# Altium PCB M-Test-Board.PcbDoc (part 2 of 2)
Units mm, origin at the board's own origin, x right, y up, seen from the top; angles counter-clockwise.
Board outline 140.08 x 105.54 mm, 2 copper layers (Top Layer, Bottom Layer); 209 components, 139 nets, 677 pads, 0 vias.
Unrouted connection lines stored in the file: 434.
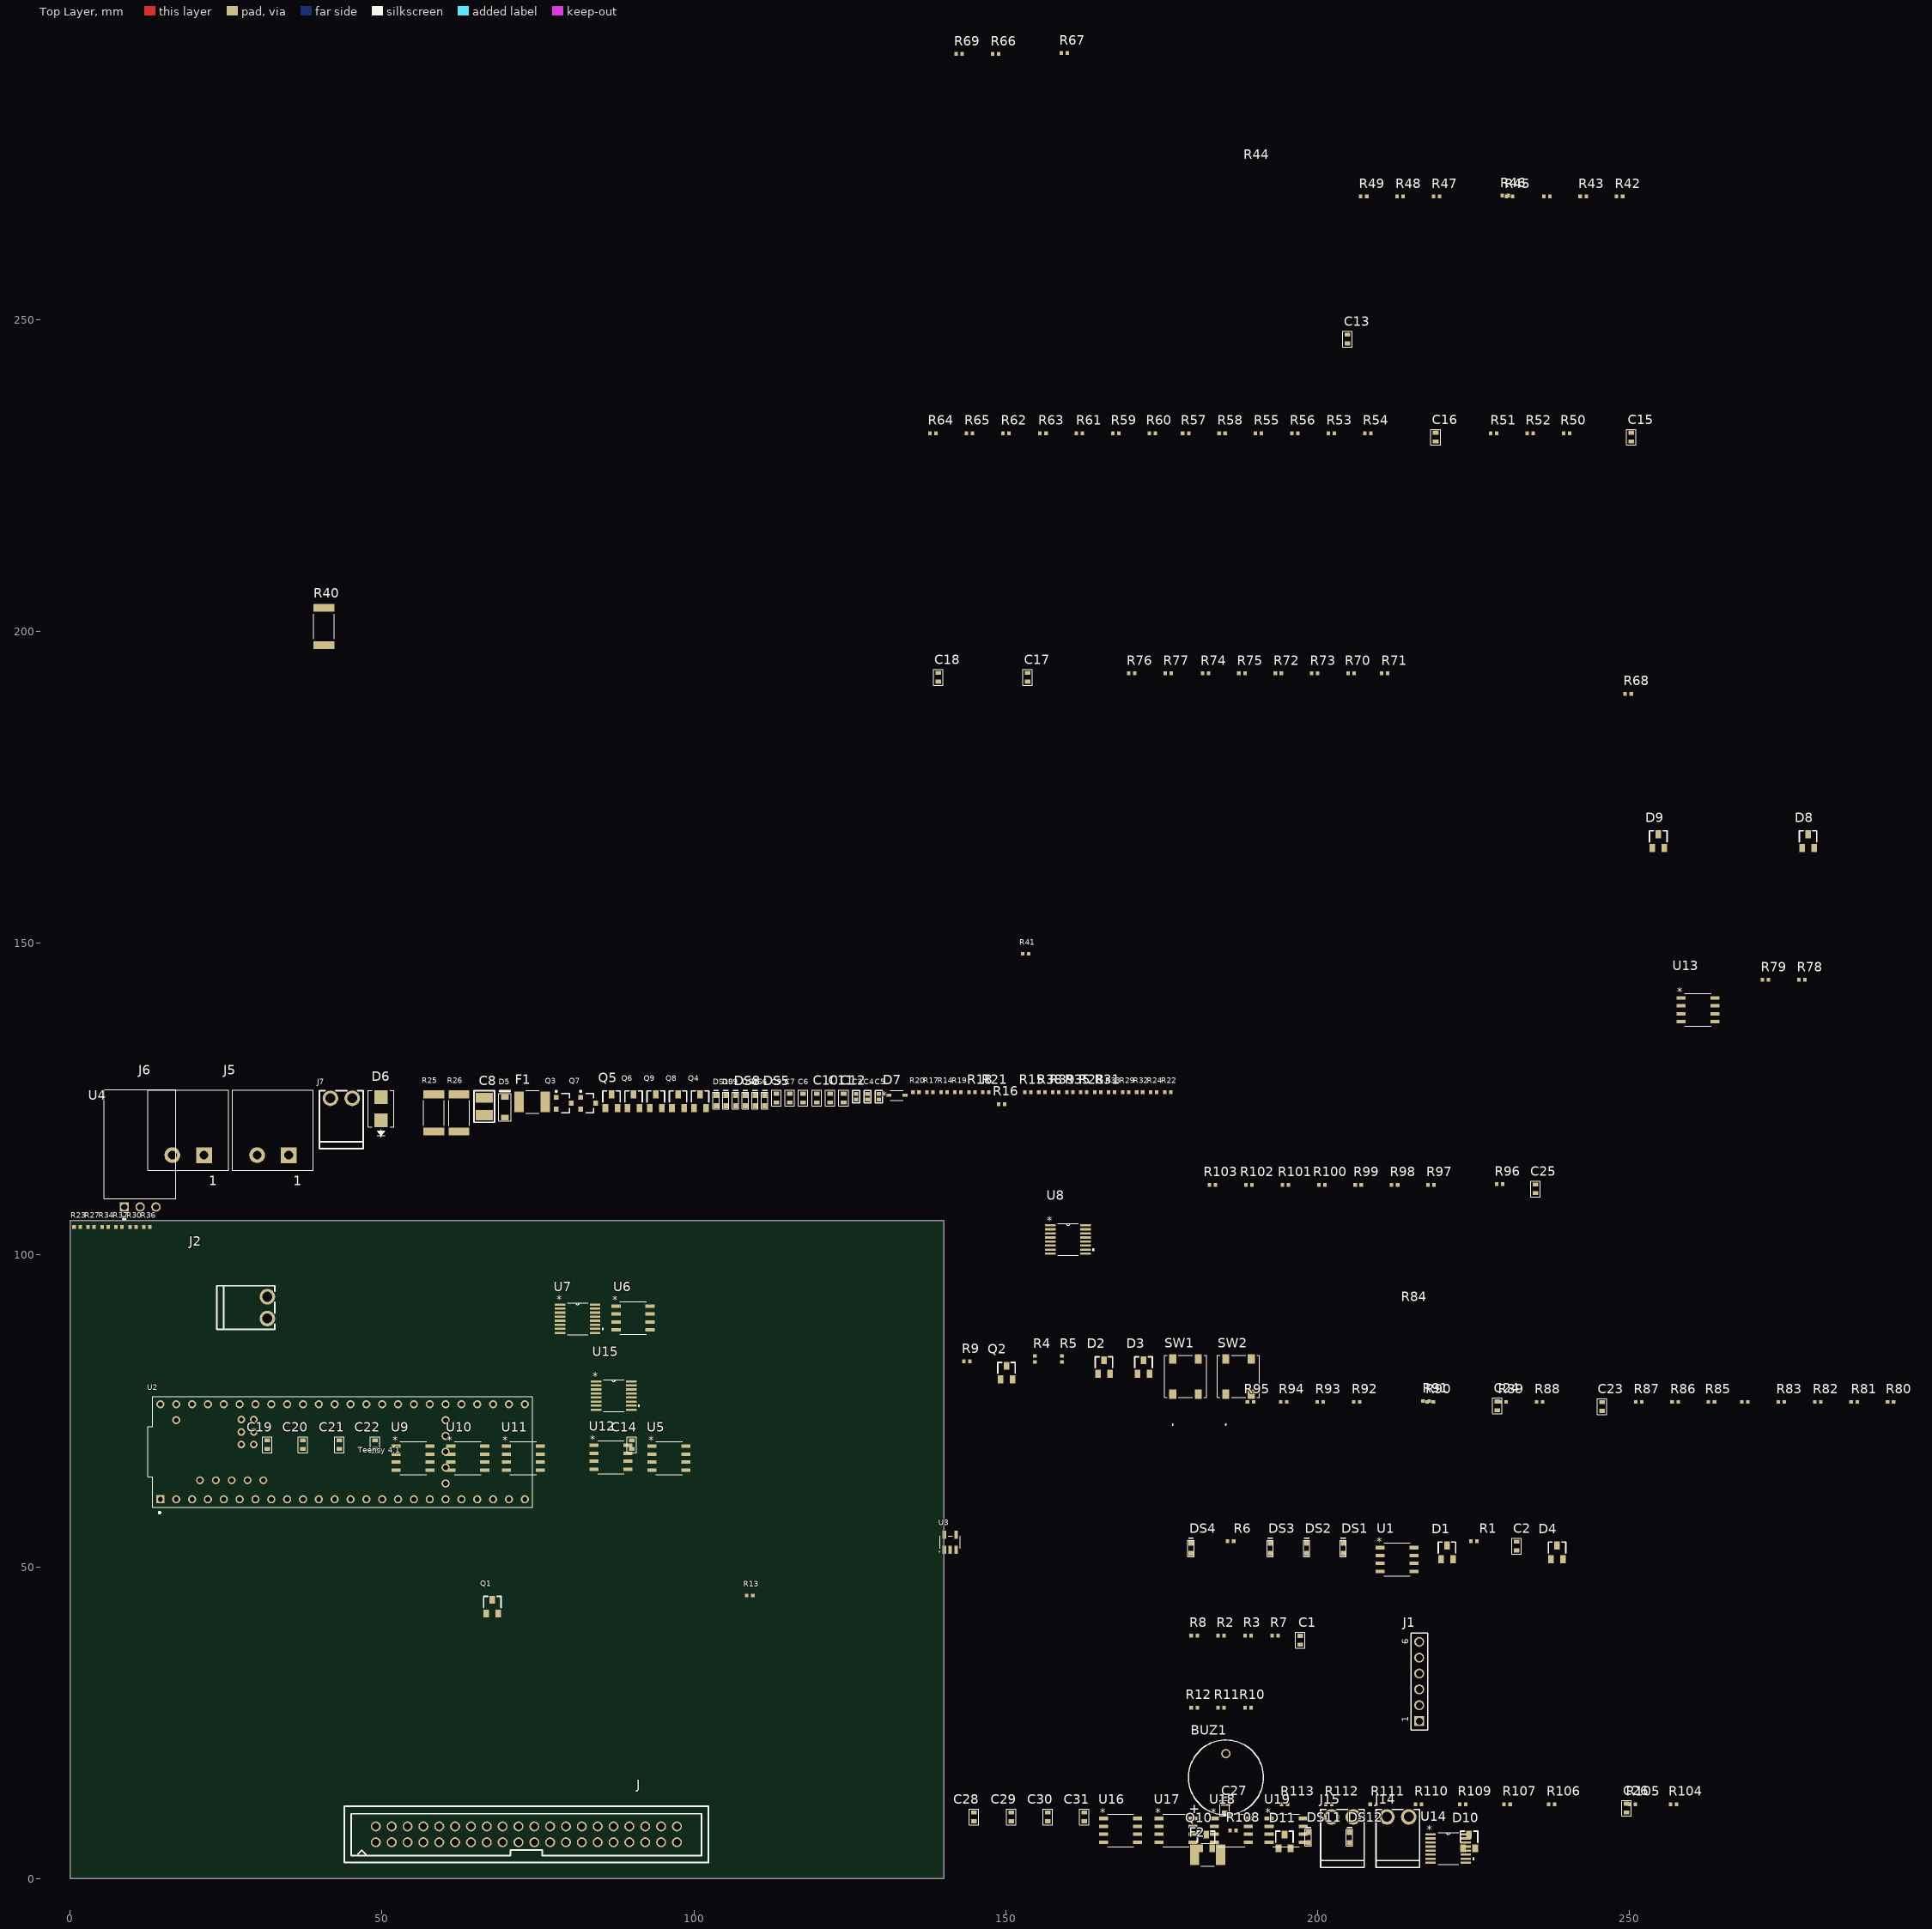
[diagram p0: Top Layer view]

## Part data (continued)
Q1 Q2 Q4 Q6 Q8 Q9 Q10: library part Tran-0002, "Trans GP BJT NPN 60V 0.2A 350mW Automotive 3-Pin SOT-23 T/R", Case/Package=SOT-23-3, Collector-emitter Voltage-Max=400mV, Frequency=250MHz, LCSC Part Number=C20526, Manufacturer="ON Semiconductor / Fairchild", Max Collector Current=200mA, Max Operating Temperature=150°C, Min Operating Temperature=-55°C, Package Description="3-Pin Small Outline Transistor, Body 2.9 x 1.3 mm, Pitch 0.95 mm", Package Reference="SOT-23 (318-08)", Power=225mW, Supplier Part Number 1=58K9431, Component Type=Transistors, ComponentLink1Description=https://datasheet.ciiva.com/22664/1708270-226, ComponentLink1URL=https://datasheet.ciiva.com/22664/1708270-226, ComponentLink2Description=https://datasheet.ciiva.com/4721/mmbt3906lt1-, ComponentLink2URL=https://datasheet.ciiva.com/4721/mmbt3906lt1-, ComponentLink3Description=https://datasheet.ciiva.com/11201/mmbt3906lt1, ComponentLink3URL=https://datasheet.ciiva.com/11201/mmbt3906lt1, ComponentLink4Description=https://datasheet.ciiva.com/16387/mmbt3906lt1, ComponentLink4URL=https://datasheet.ciiva.com/16387/mmbt3906lt1, ComponentLink5Description=https://datasheet.ciiva.com/976/mmbt3906lt1-d, ComponentLink5URL=https://datasheet.ciiva.com/976/mmbt3906lt1-d, ComponentLink6Description=https://datasheet.ciiva.com/976/mmbt3906lt1-d, ComponentLink6URL=https://datasheet.ciiva.com/976/mmbt3906lt1-d, ComponentLink7Description=https://datasheet.ciiva.com/976/mmbt3906lt1-d, ComponentLink7URL=https://datasheet.ciiva.com/976/mmbt3906lt1-d, Datasheet URL=http://www.onsemi.cn/pub_link/Collateral/MMBT3904LT1-D.PDF, Datasheet Version="Rev. 12, 11/2012", Elements=1, Height=0.94mm, Lead Free="Lead Free", Length=2.9mm, Manufacturer Part Number=MMBT3904, Max Frequency=250MHz, Mount="Surface Mount", Mounting Technology=SM, Number of Elements=1, Part Name=Tran-0002, Pins=3, Polarity=NPN, Radiation Hardening=No, REACH SVHC="No SVHC", RoHS=Yes, RoHS Compliant=Yes, Series=-, Supplier 1=Newark, Vce Max=300mV, Width=1.3mm
Q3 Q7: library part Tran-0001, "Mosfet P-channel 30V 4A SOT23-3", Case/Package=SOT-23-3, Collector Base Voltage (VCBO)=60V, Collector Emitter Breakdown Voltage=40V, Collector Emitter Saturation Voltage=300mV, Continuous Drain Current=4A, Current Rating=200mA, Drain to Source Voltage (Vdss)=30V, Emitter Base Voltage (VEBO)=6V, Frequency=300MHz, Frequency (Max)=NotRequiredMHz, Gate-Source Voltage (Max)=?12V, Input Capacitance=645pF, LCSC Part Number=C15127, Manufacturer="Alpha & Omega Semiconductor", Manufacturer Part Number=AO3401AL, Max Operating Temperature=150°C, Max Power Dissipation=1.4W, Min Operating Temperature=-55°C, Operating Temp Range=-55Cto150C, Operating Temperature Classification=Military, Output Power (Max)=NotRequiredW, Package Description="3-Pin Small Outline Transistor, Body 2.95 x 1.6 mm, Pitch 0.95 mm", Package Quantity=1, Package Reference=SOT-23-3L, Package Type=SOT-23, Power Dissipation=350mW, Power Gain=NotRequireddB, Supplier Part Number 1=AO3401AL-ND, Category=BJTs, Channel Mode=Enhancement, Collector Emitter Voltage (VCEO)=40V, ComponentLink1Description=https://media.digikey.com/pdf/Data%20Sheets/A, ComponentLink1URL=https://media.digikey.com/pdf/Data%20Sheets/A, ComponentLink2Description=https://datasheet.ciiva.com/7972/2n3904-79726, ComponentLink2URL=https://datasheet.ciiva.com/7972/2n3904-79726, ComponentLink3Description=https://datasheet.ciiva.com/22653/1922793-226, ComponentLink3URL=https://datasheet.ciiva.com/22653/1922793-226, ComponentLink4Description=https://datasheet.ciiva.com/11201/mmbt3904-11, ComponentLink4URL=https://datasheet.ciiva.com/11201/mmbt3904-11, ComponentLink5Description=https://datasheet.ciiva.com/16850/mmbt3904-16, ComponentLink5URL=https://datasheet.ciiva.com/16850/mmbt3904-16, ComponentLink6Description=https://datasheet.ciiva.com/971/mmbt3904-9718, ComponentLink6URL=https://datasheet.ciiva.com/971/mmbt3904-9718, ComponentLink7Description=https://datasheet.ciiva.com/971/mmbt3904-9718, ComponentLink7URL=https://datasheet.ciiva.com/971/mmbt3904-9718, ComponentLink8Description=https://datasheet.ciiva.com/971/mmbt3904-9718, ComponentLink8URL=https://datasheet.ciiva.com/971/mmbt3904-9718, Contact Plating=Tin,Matte, Continuous Drain Current (ID)=4A, Datasheet URL=http://www.aosmd.com/res/data_sheets/AO3401A.pdf, Datasheet Version="Rev. 3, 03/2011", Drain Current (Max)=4A, Drain Efficiency=NotRequired%, Drain-Source On-Res=0.044ohm, Drain-Source On-Volt=30V, Element Configuration=Single, Gain Bandwidth Product=300MHz, Height=0.25inch, hFE Min=100, Lead Free="Lead Free", Length=0.25inch, Manufacturer URL=http://www.aosmd.com/, Max Breakdown Voltage=40V, Max Collector Current=200mA, Max Frequency=300MHz, Mount="Surface Mount", Mounting=SurfaceMount, Mounting Technology=SurfaceMount, Noise Figure=NotRequireddB, Number of  Elements=1, Number of Elements=1, Number of Pins=3, Package URL=http://www.aosmd.com/res/packaging_information/SOT-23-3L.pdf, Packaging="Tape and Reel", Part Name=Tran-0001, Pin Count=3, Polarity=NPN, Pricing 1="1=0.03200, 10=0.02500, 100=0.01700, 500=0.017", Rad Hardened=No, Radiation Hardening=No, Rds On Max=50mR, REACH SVHC="No SVHC", RoHS=Yes, RoHS Compliant=Yes, Supplier 1=Digi-Key, Termination=SMD/SMT, Transition Frequency=300MHz, Type=PowerMOSFET, Voltage Rating (DC)=40V, Weight=0.03g, Width=0.25inch
Q5: library part Tran-0003, "PNP Ic=-200mA Vceo=-40V hfe=100~300 P=225mW SOT-23", Case/Package=SOT-23-3, Collector Base Voltage (VCBO)=40V, Collector Emitter Saturation Voltage=-400mV, Current Rating=-200mA, Emitter Base Voltage (VEBO)=5V, LCSC Part Number=C2143, Manufacturer="ON Semiconductor", Manufacturer Part Number=MMBT3906LT1G, Max Collector Current=200mA, Max Operating Temperature=150°C, Max Power Dissipation=300mW, Min Operating Temperature=-55°C, Package Description="3-Pin Small Outline Transistor, Body 2.9 x 1.3 mm, Pitch 0.95 mm", Package Quantity=1, Package Reference="SOT-23 (318-08)", Power=225mW, Supplier Part Number 1=863-MMBT3906LT1G, Transition Frequency=250MHz, Voltage Rating (DC)=-40V, Category=BJTs, Collector Emitter Breakdown Voltage=40V, Collector Emitter Voltage (VCEO)=40V, Component Type=Transistors, Contact Plating=Tin,Matte, Datasheet URL=http://www.onsemi.cn/pub_link/Collateral/MMBT3906LT1-D.PDF, Datasheet Version="Rev. 12, 10/2016", Element Configuration=Single, Elements=1, Gain Bandwidth Product=250MHz, hFE Min=60, Max Breakdown Voltage=40V, Mount="Surface Mount", Mounting Technology=SM, Number of Pins=3, Packaging="Tape and Reel", Part Name=Tran-0003, Pins=3, Polarity=PNP, Power Dissipation=300mW, Pricing 1="1=0.15000, 10=0.14600, 50=0.14600, 100=0.0790", RoHS=Yes, Supplier 1=Mouser, Vce Max=400mV
R1 R17 R29 R41: library part Res-00004, "Thick Film 0402 5.1K Ohm 1% 1/16W 0402", Case Code (Imperial)=0402, Case Code (Metric)=1005, LCSC Part Number=C25905, Manufacturer="Stackpole Electronics", Manufacturer Part Number=RMCF0402FT5K10, Max Operating Temperature=155°C, Max Power Dissipation=63mW, Min Operating Temperature=-55°C, Power Rating=62.5mW, Resistance=5.1k, Resistor Type="Thick Film", Supplier Part Number 1=RMCF0402FT5K10CT-ND, Temperature Coefficient=100ppm/°C, Tolerance=1%, Case/Package=0402, Category="Chip SMD Resistors", ComponentLink1Description=http://components.arrow.com/part/dataview/513, ComponentLink1URL=http://components.arrow.com/part/dataview/513, ComponentLink2Description=https://www.seielect.com/catalog/SEI-RMCF_RMC, ComponentLink2URL=https://www.seielect.com/catalog/SEI-RMCF_RMC, ComponentLink3Description=https://www.seielect.com/catalog/SEI-Packagin, ComponentLink3URL=https://www.seielect.com/catalog/SEI-Packagin, ComponentLink4Description=https://datasheet.ciiva.com/15193/getdatashee, ComponentLink4URL=https://datasheet.ciiva.com/15193/getdatashee, Construction=Rectangular, Contact Plating=Tin,Matte, Depth=0.5mm, Features="Automotive AEC-Q200", Height=0.016inch, Lead Free="Lead Free", Length=0.039inch, Military Standard=Not, Mount="Surface Mount", Number of Terminations=2, Packaging="Tape and Reel", Part Name=Res-00004, Pricing 1="1=0.10000, 10=0.01500, 100=0.00610, 1000=0.00", Radiation Hardening=No, RoHS=Yes, RoHS Compliant=Yes, Series=RMCF, Size Code=0402, Stock 1=131490, Supplier 1=Digi-Key, Width=0.02inch
R2 R3 R10 R11 R12 R13 R14 R39: library part Res-00009, "Thick Film 0402 330 Ohm 1% 1/16W ±100ppm/°C Molded SMD Paper T/R", Case Code (Imperial)=0402, Case Code (Metric)=1005, LCSC Part Number=C51721, Manufacturer=Yageo, Manufacturer Part Number=AF0402FR-07330RL, Max Operating Temperature=155°C, Max Power Dissipation=63mW, Min Operating Temperature=-55°C, Power Rating=62.5mW, Resistance=330R, Resistor Type="Thick Film", Supplier Part Number 1=13-AF0402FR-07330RLCT-ND, Temperature Coefficient=100ppm/°C, Tolerance=1%, Case/Package=0402, Category="Chip SMD Resistors", ComponentLink1Description=http://www.yageo.com/documents/recent/PYu-AF_, ComponentLink1URL=http://www.yageo.com/documents/recent/PYu-AF_, Features="Moisture Resistant,Anti-Sulfur", Height=0.015inch, Length=0.039inch, Mount="Surface Mount", Number of Terminations=2, Packaging="Tape and Reel", Part Name=Res-00009, Pricing 1="1=0.10000, 10=0.05800, 100=0.02360, 1000=0.01", Radiation Hardening=No, RoHS=Yes, RoHS Compliant=Yes, Stock 1=15948, Supplier 1=Digi-Key, Width=0.02inch
R4 R5 R9: library part Res-00001, "Thick Film 0402 1K Ohm 1% 1/8W 0402", Case Code (Imperial)=0402, Case Code (Metric)=1005, LCSC Part Number=C25792, Manufacturer="TE Connectivity", Manufacturer Part Number=CRGP0402F1K0, Max Operating Temperature=155°C, Max Power Dissipation=125mW, Min Operating Temperature=-55°C, Power Rating=0.125W, Resistance=1k, Resistor Type="Thick Film", Supplier Part Number 1=A130355CT-ND, Temperature Coefficient=100ppm/°C, Tolerance=1%, Case/Package=0402, Category="Chip SMD Resistors", ComponentLink1Description=https://www.te.com/commerce/DocumentDelivery/, ComponentLink1URL=https://www.te.com/commerce/DocumentDelivery/, ComponentLink4Description=none, Mount="Surface Mount", Number of Terminations=2, Packaging="Tape and Reel", Part Name=Res-00001, Pricing 1="1=0.12000, 10=0.11100, 100=0.04270, 1000=0.01", RoHS=Yes, RoHS Compliant=Yes, Stock 1=16450, Supplier 1=Digi-Key
R6: library part Res-00013, "Res Thick Film 0402 120 Ohm 1% 0.063W(1/16W) ±100ppm/C Pad SMD Automotive T/R", Case Code (Imperial)=0402, Case Code (Metric)=1005, LCSC Part Number=C25079, Manufacturer="Stackpole Electronics", Manufacturer Part Number=RMCF0402FT120R, Max Operating Temperature=155°C, Max Power Dissipation=63mW, Min Operating Temperature=-55°C, Package Quantity=10000, Resistor Type="Thick Film", Supplier Part Number 1=RMCF0402FT120RCT-ND, Temperature Coefficient=100ppm/°C, Tolerance=1%, Case/Package=0402, Category="Chip SMD Resistors", ComponentLink1Description=http://components.arrow.com/part/dataview/514, ComponentLink1URL=http://components.arrow.com/part/dataview/514, ComponentLink2Description=https://www.seielect.com/catalog/SEI-RMCF_RMC, ComponentLink2URL=https://www.seielect.com/catalog/SEI-RMCF_RMC, ComponentLink3Description=http://www.seielect.com/Catalog/SEI-RMCF_RMCP, ComponentLink3URL=http://www.seielect.com/Catalog/SEI-RMCF_RMCP, ComponentLink4Description=https://www.seielect.com/Catalog/SEI-RMCF_RMC, ComponentLink4URL=https://www.seielect.com/Catalog/SEI-RMCF_RMC, ComponentLink5Description=https://www.seielect.com/catalog/SEI-Packagin, ComponentLink5URL=https://www.seielect.com/catalog/SEI-Packagin, Contact Plating=Tin,Matte, Features="Automotive AEC-Q200", Height=0.016inch, Length=0.039inch, Mount="Surface Mount", Number of Terminations=2, Packaging="Tape and Reel", Part Name=Res-00013, Power Rating=63mW, Pricing 1="1=0.10000, 10=0.01500, 100=0.00610, 1000=0.00", Radiation Hardening=No, Resistance=120R, RoHS=Yes, RoHS Compliant=Yes, Series=RMCF, Stock 1=195943, Supplier 1=Digi-Key, Width=0.02inch
R7 R15 R16 R18 R19 R22 R23 R27 R28 R30 R31 R36 R50 R51 R52 R53 R54 R55 R56 R57 R58 R59 R60 R61 R62 R63 R64 R65 R66 R67 R68 R69 R70 R71 R72 R73 R74 R75 R76 R77 R88 R89 R90 R91 R92 R93 R94 R95 R100 R101 R102 R104 R105 R106 R107 R109 R110 R111 R112 R113: library part Res-00002, "Thick Film 0402 10K OHM 1% 1/16W 0402", Case Code (Imperial)=0402, Case Code (Metric)=1005, LCSC Part Number=C25744, Manufacturer=Yageo, Manufacturer Part Number=RC0402FR-0710KP, Max Operating Temperature=155°C, Max Power Dissipation=63mW, Min Operating Temperature=-55°C, Power Rating=62.5mW, Resistance=10k, Resistor Type="Thick Film", Supplier Part Number 1=YAG1249CT-ND, Temperature Coefficient=150ppm/°C, Tolerance=1%, Case/Package=0402, Category="Chip SMD Resistors", ComponentLink1Description=http://www.yageo.com/NewPortal/yageodocoutput, ComponentLink1URL=http://www.yageo.com/NewPortal/yageodocoutput, Features="Moisture Resistant", Height=0.016inch, Length=0.039inch, Mount="Surface Mount", Number of Terminations=2, Packaging="Tape and Reel", Part Name=Res-00002, Pricing 1="1=0.10000, 10=0.03600, 100=0.01450, 1000=0.00", RoHS=Yes, RoHS Compliant=Yes, Stock 1=161500, Supplier 1=Digi-Key, Width=0.02inch
R8 R20 R24 R32 R33 R37: library part Res-00003, "Thick Film 0402 100K OHM 1% 1/16W 0402", Case Code (Imperial)=0402, Case Code (Metric)=1005, LCSC Part Number=C25741, Manufacturer="Stackpole Electronics", Manufacturer Part Number=RMCF0402FT100K, Power Rating=62.5mW, Supplier Part Number 1=RMCF0402FT100KCT-ND, Case/Package=0402, Category="Chip SMD Resistors", Contact Plating=Tin,Matte, Mount="Surface Mount", Part Name=Res-00003, Pricing 1="1=0.10000, 10=0.01500, 100=0.00610, 1000=0.00", RoHS=Yes, Stock 1=13703190, Supplier 1=Digi-Key
R21 R34 R35 R45 R49 R86 R87 R103: library part Res-00008, "Thick Film 0402 2.8K Ohm 1% 0.063W ±100ppm/°C Molded SMD Paper T/R", Case Code (Imperial)=0402, Case Code (Metric)=1005, LCSC Part Number=C62741, Manufacturer="Stackpole Electronics", Manufacturer Part Number=RMCF0402FT2K80, Max Operating Temperature=155°C, Max Power Dissipation=63mW, Min Operating Temperature=-55°C, Power Rating=62.5mW, Resistance=2.8kR, Resistor Type="Thick Film", Supplier Part Number 1=RMCF0402FT2K80CT-ND, Temperature Coefficient=100ppm/°C, Tolerance=1%, Case/Package=0402, Category="Chip SMD Resistors", ComponentLink1Description=https://www.seielect.com/catalog/SEI-RMCF_RMC, ComponentLink1URL=https://www.seielect.com/catalog/SEI-RMCF_RMC, ComponentLink2Description=https://www.seielect.com/Catalog/SEI-RMCF_RMC, ComponentLink2URL=https://www.seielect.com/Catalog/SEI-RMCF_RMC, ComponentLink3Description=https://www.seielect.com/catalog/SEI-Packagin, ComponentLink3URL=https://www.seielect.com/catalog/SEI-Packagin, Contact Plating=Tin,Matte, Features="Automotive AEC-Q200", Height=0.016inch, Lead Free="Lead Free", Length=0.039inch, Mount="Surface Mount", Number of Terminations=2, Packaging="Tape and Reel", Part Name=Res-00008, Pricing 1="1=0.10000, 10=0.01500, 100=0.00610, 1000=0.00", Radiation Hardening=No, RoHS=Yes, RoHS Compliant=Yes, Series=RMCF, Stock 1=141882, Supplier 1=Digi-Key, Width=0.02inch
R25 R26 R40: library part Res-00005, "Thick Film  220 OHM 5% 1W 2512", Case Code (Imperial)=2512, Case Code (Metric)=6432, LCSC Part Number=C38808, Manufacturer="Stackpole Electronics", Manufacturer Part Number=RMCF2512JT220R, Max Operating Temperature=155°C, Max Power Dissipation=1W, Min Operating Temperature=-55°C, Resistance=220R, Resistor Type="Thick Film", Supplier Part Number 1=RMCF2512JT220RCT-ND, Temperature Coefficient=200ppm/°C, Tolerance=5%, Case/Package=2512, Category="Chip SMD Resistors", ComponentLink1Description=https://datasheet.ciiva.com/15193/getdatashee, ComponentLink1URL=https://datasheet.ciiva.com/15193/getdatashee, Construction=Rectangular, Contact Plating=Tin,Matte, Depth=3.2mm, Features="Automotive AEC-Q200", Height=0.028inch, Lead Free="Lead Free", Length=0.248inch, Military Standard=Not, Mount="Surface Mount", Number of Terminations=2, Packaging="Tape and Reel", Part Name=Res-00005, Power Rating=1W, Pricing 1="1=0.30000, 10=0.25300, 100=0.09890, 1000=0.04", Radiation Hardening=No, RoHS=Yes, RoHS Compliant=Yes, Series=RMCF, Size Code=2512, Stock 1=85, Supplier 1=Digi-Key, Width=0.126inch
R38: library part Res-00010, "Thick Film 0402 680 Ohm 1% 0.063W(1/16W) ±100ppm/C Pad SMD Automotive T/R", Case Code (Imperial)=0402, Case Code (Metric)=1005, LCSC Part Number=C25130, Manufacturer="Stackpole Electronics", Manufacturer Part Number=RMCF0402FT680R, Max Operating Temperature=155°C, Max Power Dissipation=63mW, Min Operating Temperature=-55°C, Package Quantity=10000, Power Rating=62.5mW, Resistance=680R, Resistor Type="Thick Film", Supplier Part Number 1=RMCF0402FT680RCT-ND, Temperature Coefficient=100ppm/°C, Tolerance=1%, Case/Package=0402, Category="Chip SMD Resistors", ComponentLink1Description=http://www.seielect.com/Catalog/SEI-RMCF_RMCP, ComponentLink1URL=http://www.seielect.com/Catalog/SEI-RMCF_RMCP, ComponentLink2Description=https://www.seielect.com/catalog/SEI-RMCF_RMC, ComponentLink2URL=https://www.seielect.com/catalog/SEI-RMCF_RMC, ComponentLink3Description=https://www.seielect.com/Catalog/SEI-RMCF_RMC, ComponentLink3URL=https://www.seielect.com/Catalog/SEI-RMCF_RMC, ComponentLink4Description=https://www.seielect.com/catalog/SEI-Packagin, ComponentLink4URL=https://www.seielect.com/catalog/SEI-Packagin, Contact Plating=Tin,Matte, Features="Automotive AEC-Q200", Height=0.016inch, Length=0.039inch, Mount="Surface Mount", Number of Terminations=2, Packaging="Tape and Reel", Part Name=Res-00010, Pricing 1="1=0.10000, 10=0.01500, 100=0.00610, 1000=0.00", Radiation Hardening=No, RoHS=Yes, RoHS Compliant=Yes, Series=RMCF, Stock 1=143190, Supplier 1=Digi-Key, Width=0.02inch
R42 R43 R44 R78 R79 R80 R81 R82 R83 R84 R85 R96 R97 R98 R99: library part Res-00011, "Res Thick Film 0402 51K Ohm 1% 0.063W(1/16W) ±100ppm/C Pad SMD Automotive T/R", Case Code (Imperial)=0402, Case Code (Metric)=1005, LCSC Part Number=C25794, Manufacturer="Stackpole Electronics", Manufacturer Part Number=RMCF0402FT51K0, Max Operating Temperature=155°C, Max Power Dissipation=63mW, Min Operating Temperature=-55°C, Resistance=51kR, Resistor Type="Thick Film", Supplier Part Number 1=RMCF0402FT51K0CT-ND, Temperature Coefficient=100ppm/°C, Tolerance=1%, Case/Package=0402, Category="Chip SMD Resistors", ComponentLink1Description=http://components.arrow.com/part/dataview/535, ComponentLink1URL=http://components.arrow.com/part/dataview/535, ComponentLink2Description=https://www.seielect.com/catalog/SEI-RMCF_RMC, ComponentLink2URL=https://www.seielect.com/catalog/SEI-RMCF_RMC, ComponentLink3Description=https://www.seielect.com/Catalog/SEI-RMCF_RMC, ComponentLink3URL=https://www.seielect.com/Catalog/SEI-RMCF_RMC, ComponentLink4Description=https://www.seielect.com/catalog/SEI-Packagin, ComponentLink4URL=https://www.seielect.com/catalog/SEI-Packagin, Contact Plating=Tin,Matte, Features="Automotive AEC-Q200", Height=0.016inch, Length=0.039inch, Mount="Surface Mount", Number of Terminations=2, Packaging="Tape and Reel", Part Name=Res-00011, Power Rating=63mW, Pricing 1="1=0.10000, 10=0.01500, 100=0.00610, 1000=0.00", Radiation Hardening=No, RoHS=Yes, RoHS Compliant=Yes, Series=RMCF, Stock 1=588931, Supplier 1=Digi-Key, Width=0.02inch
R46 R47 R48: library part Res-00012, "Res Thick Film 0402 8.2K Ohm 5% 0.063W ±100ppm/°C Molded SMD Paper T/R", Case Code (Imperial)=0402, Case Code (Metric)=1005, LCSC Part Number=C25924, Manufacturer="Stackpole Electronics", Manufacturer Part Number=RMCF0402JT8K20, Max Operating Temperature=155°C, Max Power Dissipation=63mW, Min Operating Temperature=-55°C, Resistance=8.2kR, Resistor Type="Thick Film", Supplier Part Number 1=738-RMCF0402JT8K20CT-ND, Temperature Coefficient=100ppm/°C, Tolerance=5%, Case/Package=0402, Category="Chip SMD Resistors", ComponentLink1Description=https://www.seielect.com/Catalog/SEI-RMCF_RMC, ComponentLink1URL=https://www.seielect.com/Catalog/SEI-RMCF_RMC, ComponentLink2Description=https://www.seielect.com/catalog/sei-rmcf_rmc, ComponentLink2URL=https://www.seielect.com/catalog/sei-rmcf_rmc, ComponentLink3Description=https://www.seielect.com/catalog/SEI-RMCF_RMC, ComponentLink3URL=https://www.seielect.com/catalog/SEI-RMCF_RMC, ComponentLink4Description=http://www.seielect.com/Catalog/Sei-RMC.pdf?s, ComponentLink4URL=http://www.seielect.com/Catalog/Sei-RMC.pdf?s, Contact Plating=Tin,Matte, Features="Automotive AEC-Q200", Height=0.016inch, Lead Free="Lead Free", Length=0.039inch, Mount="Surface Mount", Number of Terminations=2, Packaging="Tape and Reel", Part Name=Res-00012, Power Rating=63mW, Pricing 1="1=0.10000, 10=0.01200, 100=0.00470, 1000=0.00", Radiation Hardening=No, RoHS=Yes, RoHS Compliant=Yes, Series=RMCF, Size Code=0402, Stock 1=9938, Supplier 1=Digi-Key, Width=0.02inch
R108: library part Res-00009, "Thick Film 0402 120 Ohm 1% 1/16W ±100ppm/°C Molded SMD Paper T/R", Case Code (Imperial)=0402, Case Code (Metric)=1005, LCSC Part Number=C51721, Manufacturer=Yageo, Manufacturer Part Number=AF0402FR-07330RL, Max Operating Temperature=155°C, Max Power Dissipation=63mW, Min Operating Temperature=-55°C, Power Rating=62.5mW, Resistance=330R, Resistor Type="Thick Film", Supplier Part Number 1=13-AF0402FR-07330RLCT-ND, Temperature Coefficient=100ppm/°C, Tolerance=1%, Case/Package=0402, Category="Chip SMD Resistors", ComponentLink1Description=http://www.yageo.com/documents/recent/PYu-AF_, ComponentLink1URL=http://www.yageo.com/documents/recent/PYu-AF_, Features="Moisture Resistant,Anti-Sulfur", Height=0.015inch, Length=0.039inch, Mount="Surface Mount", Number of Terminations=2, Packaging="Tape and Reel", Part Name=Res-00009, Pricing 1="1=0.10000, 10=0.05800, 100=0.02360, 1000=0.01", Radiation Hardening=No, RoHS=Yes, RoHS Compliant=Yes, Stock 1=15948, Supplier 1=Digi-Key, Width=0.02inch
SW1: library part SW-0001, "Switch Tactile N.O. SPST Round Button J-Bend", Actuator Color=Blue, Case/Package=SMD/SMT, Current Rating=50mA, LCSC Part Number=C221766, Manufacturer="ITT C&K", Manufacturer Part Number=KSC741JLFS, Max Operating Temperature=85°C, Max Voltage Rating (DC)=32V, Min Operating Temperature=-40°C, Operating Force=4N, Package Quantity=1000, Power Rating=1W, Ratings="IP67,Waterproof,Dust Tight", Supplier Part Number 1=CKN10309CT-ND, Actuator Length=1.7mm, Actuator Type=Standard, Category="Tactile Switches", ComponentLink1Description=https://datasheet.ciiva.com/16458/ksc741jlfs-, ComponentLink1URL=https://datasheet.ciiva.com/16458/ksc741jlfs-, ComponentLink2Description=https://datasheet.ciiva.com/2900/ksc-2900326., ComponentLink2URL=https://datasheet.ciiva.com/2900/ksc-2900326., ComponentLink3Description=https://datasheet.ciiva.com/2900/ksc-2900327., ComponentLink3URL=https://datasheet.ciiva.com/2900/ksc-2900327., ComponentLink4Description=https://datasheet.ciiva.com/2900/ksc-2900328., ComponentLink4URL=https://datasheet.ciiva.com/2900/ksc-2900328., ComponentLink5Description=https://datasheet.ciiva.com/22829/0900766b80a, ComponentLink5URL=https://datasheet.ciiva.com/22829/0900766b80a, ComponentLink6Description=https://datasheet.ciiva.com/16298/ksc441j70sh, ComponentLink6URL=https://datasheet.ciiva.com/16298/ksc441j70sh, ComponentLink7Description=https://datasheet.ciiva.com/18144/ksc-22jan15, ComponentLink7URL=https://datasheet.ciiva.com/18144/ksc-22jan15, ComponentLink8Description=https://datasheet.ciiva.com/2900/ksc-2900355., ComponentLink8URL=https://datasheet.ciiva.com/2900/ksc-2900355., ComponentLink9Description=https://datasheet.ciiva.com/2900/ksc-2900356., ComponentLink9URL=https://datasheet.ciiva.com/2900/ksc-2900356., ComponentLink10Description=https://datasheet.ciiva.com/2900/ksc-2900357., ComponentLink10URL=https://datasheet.ciiva.com/2900/ksc-2900357., ComponentLink11Description=https://datasheet.ciiva.com/16155/ksc-11mar10, ComponentLink11URL=https://datasheet.ciiva.com/16155/ksc-11mar10, Contact Material=Silver, Contact Plating=Silver, Depth=6.8mm, Illumination Type=Non-Illuminated, Lead Free="Lead Free", Length=6.2mm, Max Current Rating=50mA, Mechanical Life=300000Cycles, Mount="Surface Mount", Orientation=Straight, Packaging="Tape and Reel", Part Name=SW-0001, Pricing 1="1=0.59000, 10=0.56600, 25=0.54520, 100=0.4719", Radiation Hardening=No, REACH SVHC="No SVHC", RoHS=Yes, RoHS Compliant=Yes, Series=KSC, Size=6.2mm, Stock 1=157978, Supplier 1=Digi-Key, Switch Function=Off-Mom, Switch Travel=0.4mm, Termination=J-Bend, Throw Configuration=SPST, Voltage Rating (DC)=32V
SW2: library part SW-0002, "Switch Tactile N.O. SPST Round Button J-Bend", Contact Current Rating=50mA, LCSC Part Number=C221748, Manufacturer="ITT C&K", Manufacturer Part Number=KSC441J70SHLFS, Max Operating Temperature=85°C, Max Voltage Rating (DC)=32V, Min Operating Temperature=-40°C, Operating Force=5N, Package Quantity=1, Power Rating=1W, Supplier Part Number 1=401-1784-1-ND, Actuator Length=2.6mm, Actuator Type=Standard, Category="Tactile Switches", Contact Material=Silver, Contact Plating=Silver, Current Rating=50mA, Depth=6.8mm, Illumination Type=Non-Illuminated,Illuminated, Length=6.2mm, Max Current Rating=50mA, Mechanical Life=300000Cycles, Mount="Surface Mount", Orientation=Straight, Packaging="Tape and Reel", Part Name=SW-0002, Pricing 1="1=0.61000, 10=0.58400, 25=0.56200, 100=0.4863", RoHS=Yes, Series=KSC, Stock 1=60296, Supplier 1=Digi-Key, Switch Function=Off-Mom, Switch Travel=0.75mm, Termination=J-Bend, Throw Configuration=SPST, Voltage Rating (DC)=32V
U1: library part dd-0001, "IC TXRX RS485 HALF DUPLEX 8SOIC", BOM_JLCPCB Part Class="Basic Part", BOM_Manufacturer=EXAR, BOM_Manufacturer Part=SP485EEN-L/TR, Case/Package=SOIC, LCSC Part Number=C6855, Manufacturer=Exar, Max Operating Temperature=85°C, Max Power Dissipation=550mW, Max Supply Voltage=5.25V, Min Operating Temperature=-40°C, Min Supply Voltage=4.75V, Nominal Supply Current=900uA, Operating Supply Voltage=5V, Package Display=No, Package Quantity=2500, BOM_Supplier=LCSC, BOM_Supplier Part=C6855, Category="Interface ICs", ComponentLink1Description=https://datasheet.ciiva.com/16991/0900766b80d, ComponentLink1URL=https://datasheet.ciiva.com/16991/0900766b80d, ComponentLink2Description=https://datasheet.ciiva.com/6633/sp481e-485e-, ComponentLink2URL=https://datasheet.ciiva.com/6633/sp481e-485e-, ComponentLink3Description=https://datasheet.ciiva.com/6633/sp481e-485e-, ComponentLink3URL=https://datasheet.ciiva.com/6633/sp481e-485e-, ComponentLink4Description=https://datasheet.ciiva.com/6633/sp481e-485e-, ComponentLink4URL=https://datasheet.ciiva.com/6633/sp481e-485e-, ComponentLink5Description=https://datasheet.ciiva.com/16378/sp485een-l-, ComponentLink5URL=https://datasheet.ciiva.com/16378/sp485een-l-, Data Rate=10Mbps, Height=1.65mm, Interface=RS-422,RS-485, Lead Free="Lead Free", Length=4.9mm, Logic Function=Transceiver, Manufacturer Part Number=SP485EEN-L/TR, Mount="Surface Mount", Number of Drivers=1, Number of Pins=8, Number of Receivers=1, Number of Transceivers=1, Number of Transmitters=1, Packaging="Tape and Reel", Part Name=dd-0001, Radiation Hardening=No, RoHS=Yes, RoHS Compliant=Yes, Simplex/Duplex="Half Duplex", spicePre=U, spiceSymbolName=SP485EEN-L/TR, Supplier 1=Digi-Key, Supplier Part Number 1=SP485EEN-L/TR-ND, Width=3.9mm
U2: library part Mod-0001, "RT1062 Teensy 4.1 series ARM® Cortex®-M7 MPU", LCSC Part Number=N/A, Manufacturer=SparkFun, Manufacturer Part Number=16771, Supplier Part Number 1=1568-DEV-16771-ND, Category="Embedded Processors and Controllers", Part Name=Mod-0001, Pricing 1="1=29.38000 (USD)", RoHS=Yes, Stock 1=1896, Supplier 1=Digi-Key
U3: library part LDO-0001, "Linear Voltage Regulator IC Positive Fixed, 1 Input 14V Max, Output 3.3V, 150mA, 0.35V drop,  @ 150mA  SOT-23-5", Case/Package=SOT23-5, LCSC Part Number=C155584, Manufacturer=STMicroelectronics, Manufacturer 1="ST Microelectronics", Supplier Part Number 1=497-7807-1-ND, Category="Voltage Regulators - Linear", Manufacturer Part Number=LK112M33TR, Manufacturer Part Number 1=LK112M33TR, Part Name=LDO-0001, Pricing 1="1=0.10000,10=0.4200. 100=0.11700", Suplier 1 Status="in stack", Suplier 2 Status="no stack", Supplier 1=Digi-Key, Supplier 2=LCSC, Supplier Part Number 2=C155584
U4: library part Mod-0002, "Module DC-DC 12VIN 1-OUT 5V 2A 10W 3-Pin SIP Module", Case/Package=SIP, Current - Output 1=2A, LCSC Part Number=N/A, Manufacturer=CUI, Max Input Voltage=18V, Max Operating Temperature=85°C, Max Power Dissipation=10W, Min Input Voltage=7V, Min Operating Temperature=-40°C, Output Voltage=5V, Package Quantity=44, Supplier Part Number 1=102-2188-ND, Category="Board Mount Modules", ComponentLink1Description=https://datasheet.ciiva.com/2374/v78xx-2000-2, ComponentLink1URL=https://datasheet.ciiva.com/2374/v78xx-2000-2, Efficiency=91%, Features=OTP,SCP, Height=0.35inch, Isolation=Non-Isolated, Lead Free="Lead Free", Length=0.69inch, Manufacturer Part Number=V7805-2000R, Max Output Current=2A, Mount="Through Hole", Number of Outputs=1, Output Power=10W, Packaging=Rail/Tube, Part Name=Mod-0002, Pricing 1="1=9.85000, 5=9.77400, 10=9.70000, 25=9.55040,", RoHS=Yes, RoHS Compliant=Yes, Series=V78-2000, Stock 1=1153, Supplier 1=Digi-Key, Voltage - Output 1=5V, Width=0.45inch
U5 U9 U10 U11 U12 U16 U17 U18 U19: library part Diode-0012, "TVS DIODE 5.5VWM SOT6", Capacitance=1.5pF, Case/Package=SOT, LCSC Part Number=C527516, Manufacturer="Texas Instruments", Max Operating Temperature=85°C, Max Power Dissipation=100W, Min Operating Temperature=-40°C, Package Quantity=1, Supplier Part Number 1=296-21887-1-ND, Category="ESD and Circuit Protection ICs", ComponentLink1Description=https://datasheet.ciiva.com/5839/1535398-5839, ComponentLink1URL=https://datasheet.ciiva.com/5839/1535398-5839, ComponentLink2Description=https://datasheet.ciiva.com/22696/1831342-226, ComponentLink2URL=https://datasheet.ciiva.com/22696/1831342-226, ComponentLink3Description=https://datasheet.ciiva.com/1219/tpd4e001-121, ComponentLink3URL=https://datasheet.ciiva.com/1219/tpd4e001-121, ComponentLink4Description=https://datasheet.ciiva.com/15134/getdatashee, ComponentLink4URL=https://datasheet.ciiva.com/15134/getdatashee, ComponentLink5Description=https://datasheet.ciiva.com/7659/1853592-7659, ComponentLink5URL=https://datasheet.ciiva.com/7659/1853592-7659, ComponentLink6Description=https://datasheet.ciiva.com/338/tpd4e001-3380, ComponentLink6URL=https://datasheet.ciiva.com/338/tpd4e001-3380, ComponentLink7Description=https://datasheet.ciiva.com/338/tpd4e001-3380, ComponentLink7URL=https://datasheet.ciiva.com/338/tpd4e001-3380, ComponentLink8Description=https://datasheet.ciiva.com/338/tpd4e001-3380, ComponentLink8URL=https://datasheet.ciiva.com/338/tpd4e001-3380, Contact Plating=Gold, Depth=1.2mm, Height=0.55mm, Lead Free="Lead Free", Length=1.6mm, Manufacturer Part Number=TPD4E001DRLR, Mount="Surface Mount", Number of Pins=6, Packaging="Tape and Reel", Part Name=Diode-0012, Pricing 1="1=0.66000, 10=0.58100, 100=0.44520, 500=0.351", Radiation Hardening=No, REACH SVHC="No SVHC", RoHS=Yes, RoHS Compliant=Yes, Series=-, Stock 1=42388, Supplier 1=Digi-Key, Termination=SMD/SMT, Weight=9.9E-05oz, Width=1.2mm
U6 U13: library part amp-00001, "Op Amp Dual Micropower Amplifier R-R O/P 5V 8", Case/Package=SOIC, Dual Supply Voltage=9V, Input Bias Current=2nA, Input Offset Voltage (Vos)=1.5mV, LCSC Part Number=C1346801, Manufacturer="TI National Semiconductor", Max Dual Supply Voltage=16V, Max Operating Temperature=85°C, Max Supply Voltage=5V, Min Dual Supply Voltage=1.5V, Min Operating Temperature=-40°C, Min Supply Voltage=2.7V, Nominal Supply Current=15uA, Operating Supply Voltage=3V, Output Current=2mA, Output Current per Channel=16mA, Package Quantity=95, Power Supply Rejection Ratio (PSRR)=50dB, Supplier Part Number 1=LPV358M/NOPB-ND, Voltage Gain=100dB, Amplifier Type="GENERAL PURPOSE", Bandwidth=152kHz, Category="Amplifiers - Op Amps, Buffer, Instrumentation", Common Mode Rejection Ratio=50dB, ComponentLink1Description=https://datasheet.ciiva.com/1804/lpv321-n-180, ComponentLink1URL=https://datasheet.ciiva.com/1804/lpv321-n-180, Contact Plating=Gold, Gain Bandwidth Product=152kHz, Height=1.45mm, Lead Free="Lead Free", Length=4.9mm, Manufacturer Part Number=LPV358M/NOPB, Mount="Surface Mount", Number of Amplifiers=2, Number of Channels=2, Number of Circuits=2, Number of Elements=2, Number of Pins=8, Operating Supply Current=15uA, Packaging=Rail/Tube, Part Name=amp-00001, Pricing 1="1=1.43000, 10=1.27600, 25=1.21080, 100=0.9947", Radiation Hardening=No, REACH SVHC="No SVHC", RoHS=Yes, RoHS Compliant=Yes, Slew Rate=0.1V/µs, Stock 1=5163, Supplier 1=Digi-Key, Supply Current=15uA, Technology=BICMOS, Unity Gain Bandwidth Product=152kHz, Width=3.9mm
U7 U8 U14 U15: library part AIC-0001, "5-V, 8: 1, 1-channel analog mutliplexer 16-TS", Case/Package=TSSOP, Dual Supply Voltage=3V, Generic Part Number=CD74HC4051, High Level Output Current=25mA, LCSC Part Number=C352826, Manufacturer="Texas Instruments", Max Dual Supply Voltage=5V, Max Operating Temperature=125°C, Max Supply Voltage=6V, Min Dual Supply Voltage=1V, Min Operating Temperature=-55°C, Min Supply Voltage=2V, Nominal Supply Current=16uA, On-State Resistance=130R, Operating Temperature Range(C)="-55 to 125", Package Quantity=1, Rating=Catalog, Supplier Part Number 1=29AH3620, Bandwidth=180MHz, Bandwidth(Max)(MHz)=180, Category="Decoders and Multiplexers", Code_JEDEC="MS-012 variation AC", ComponentLink1Description=https://datasheet.ciiva.com/15127/getdatashee, ComponentLink1URL=https://datasheet.ciiva.com/15127/getdatashee, ComponentLink2Description=https://datasheet.ciiva.com/27092/1326571-270, ComponentLink2URL=https://datasheet.ciiva.com/27092/1326571-270, ComponentLink3Description=https://datasheet.ciiva.com/1514/1789854-1514, ComponentLink3URL=https://datasheet.ciiva.com/1514/1789854-1514, ComponentLink4Description=https://datasheet.ciiva.com/1171/1633734-1171, ComponentLink4URL=https://datasheet.ciiva.com/1171/1633734-1171, ComponentLink5Description=https://datasheet.ciiva.com/1171/1633734-1171, ComponentLink5URL=https://datasheet.ciiva.com/1171/1633734-1171, ComponentLink6Description=https://datasheet.ciiva.com/2978/cd74hct4053-, ComponentLink6URL=https://datasheet.ciiva.com/2978/cd74hct4053-, ComponentLink7Description=https://datasheet.ciiva.com/46391/1840262-463, ComponentLink7URL=https://datasheet.ciiva.com/46391/1840262-463, Configuration="1 X 1：8 MUX", Contact Plating=Gold, Crosstalk=Yes, DatasheetVersion=SCHS122J, Height=1.15mm, Lead Free="Lead Free", Length=5mm, Logic Function=Multiplexer,Demultiplexer, Low Level Output Current=25mA, Manufacturer Part Number=CD74HC4051PWR, Max Output Current=25mA, Mount="Surface Mount", Number of Bits=8, Number of Channels=1, Number of Circuits=1, Number of Inputs=8, Number of Outputs=1, Number of Pins=16, Number of Switches=1, Output Type=CMOS, PackageReference=D0016A, PackageVersion=http://www.ti.com/lit/ml/mpds178g/mpds178g.pdf, Packaging="Tape and Reel", Part Name=AIC-0001, Polarity=Non-Inverting, Pricing 1="1=0.33420, 10=0.26780, 30=0.23940, 100=0.2039", Propagation Delay=60ns, Radiation Hardening=No, REACH SVHC="No SVHC", RoHS=Yes, RoHS Compliant=Yes, Ron(Max)(Ohms)=130, Ron(Typ)(Ohms)=45, Series=74HC, Stock 1=12645, Supplier 1=Newark, Supply Current=16uA, Supply Type=Single,Dual, Termination=SMD/SMT, Turn-Off Delay Time=225ns, Turn-On Delay Time=225ns, VCC(Max)(V)=6, VCC(Min)(V)=2, Weight=0.002183oz, Width=4.4mm

## Nets (pads, with @x,y where several pads share a name; then routed paths per layer and width w, separated by ;. In a path a pad name is that pad's centre, name@x,y a point inside that pad or via, vN(x,y) a via of type N, cw(c..) or ccw(c..) an arc to the next point about the centre after c; other vN are vias at no path point)
+3.3V: C11.1 C12.1 C13.1 C14.2 C19.2 C20.2 C21.2 C22.2 C23.1 C28.2 C29.2 C30.2 C31.2 D2.2 D3.2 D7.2 D8.2 D9.2 D10.2 D11.2 R1.1 R10.1 R11.1 R12.1 R13.1 R14.1 R39.1 R40.1 U3.4 U5.6 U6.8 U9.6 U10.6 U11.6 U12.6 U13.8 U16.6 U17.6 U18.6 U19.6
+5V: BUZ1.1 C1.2 C8.1 C9.1 C16.2 C18.2 C25.2 C27.2 D4.2 R3.2 R38.1 R68.1 R70.2 R71.2 R72.1 R74.1 R76.1 U1.8 U2.VIN U3.1 U3.5 U4.3 U7.16 U8.16 U14.16 U15.16
+12V: D6.1 F1.1 F2.1 J7.2
GND: C1.1 C2.2 C3.2 C4.2 C5.2 C6.2 C7.2 C8.2 C9.2 C10.2 C11.2 C12.2 C13.2 C14.1 C15.2 C16.1 C17.2 C18.1 C19.1 C20.1 C21.1 C22.1 C23.2 C24.2 C25.1 C26.2 C27.1 C28.1 C29.1 C30.1 C31.1 D2.1 D3.1 D7.1 D8.1 D9.1 D10.1 D11.1 DS6.2 DS7.2 DS8.2 DS9.2 J1.3 J5.2 J6.2 J7.1 J15.2 Q1.2 Q2.2 Q4.2 Q6.2 Q8.2 Q9.2 Q10.2 R2.2 R8.2 R21.2 R24.2 R33.2 R34.2 R35.2 R37.2 R40.2 R41.2 R42.1 R44.1 R45.1 R46.1 R47.1 R48.1 R49.1 R66.2 R67.2 R69.1 R73.1 R75.1 R77.1 R78.1 R79.1 R80.1 R82.1 R83.1 R84.1 R85.1 R86.1 R87.1 R96.1 R98.1 R99.1 R100.2 R101.2 R102.2 R103.1 SW1.1 SW1.2 SW2.1 SW2.2 U1.5 U2.GND1 U2.GND3 U3.2 U4.2 U5.3 U6.4 U7.6 U7.7 U7.8 U8.6 U8.7 U8.8 U9.3 U10.3 U11.3 U12.3 U13.4 U14.6 U14.7 U14.8 U15.6 U15.7 U15.8 U16.3 U17.3 U18.3 U19.3
NetBUZ1_2: BUZ1.2 D4.3 Q2.3
NetC2_1: C2.1 Q1.1 R7.2 R8.1
NetC3_1: C3.1 R18.1 R21.1 U2.15
NetC4_1: C4.1 R30.1 R34.1 U2.41
NetC5_1: C5.1 R31.1 R35.1 U2.40
NetC6_1: C6.1 C7.1 D6.2 DS10.1 U4.1
NetC10_1: C10.1 U3.3
NetC15_1: C15.1 D8.3 U6.3 U7.3
NetC17_1: C17.1 D9.3 U6.5 U8.3
NetC24_1: C24.1 D10.3 U13.3 U14.3
NetC26_1: C26.1 D11.3 U13.5 U15.3
NetD1_3: D1.3 U1.1
NetD2_3: D2.3 R4.1 U2.2
NetD3_3: D3.3 R5.1 U2.3
NetD5_1: D5.1 Q5.2 Q7.3 R29.2 R30.2
NetD5_2: D5.2 J6.1 R23.1 R25.1 R26.1 R31.2
NetDS1_1: DS1.1 R10.2
NetDS2_1: DS2.1 R11.2
NetDS3_1: DS3.1 R12.2
NetDS4_1: DS4.1 R13.2
NetDS5_1: DS5.1 R14.2 R15.2
NetDS5_2: DS5.2 Q4.3 R15.1 U2.13
NetDS6_1: DS6.1 R17.1
NetDS7_1: DS7.1 R29.1
NetDS8_1: DS8.1 R39.2
NetDS9_1: DS9.1 R38.2
NetDS10_2: DS10.2 R41.1
NetF1_2: F1.2 Q3.2 R16.1
NetF2_2: F2.2 Q7.2 R28.1
NetJ1_1: J1.1 R5.2 SW2.3 SW2.4
NetJ1_2: J1.2 R4.2 SW1.3 SW1.4
NetJ2_1: J2.1 R3.1 R6.1 R6.2 U1.6
NetJ2_2: J2.2 R2.1 U1.7
NetJ5_1: J5.1 Q3.3 R17.2 R18.2
NetJ8_3: U2.18 U5.4
NetJ8_6: U2.19 U5.5
NetJ15_1: J15.1 R108.1
NetQ1_3: Q1.3 U2.PROGRAM
NetQ2_1: Q2.1 R9.2
NetQ3_1: Q3.1 R16.2 R20.1
NetQ4_1: Q4.1 R19.2
NetQ5_1: Q5.1 R23.2
NetQ5_3: Q5.3 R19.1
NetQ6_1: Q6.1 R22.2 R24.1
NetQ6_3: Q6.3 R20.2
NetQ7_1: Q7.1 R28.2 R32.1
NetQ8_1: Q8.1 R27.2 R33.1
NetQ8_3: Q8.3 R25.2 R26.2
NetQ9_1: Q9.1 R36.2 R37.1
NetQ9_3: Q9.3 R32.2
NetQ10_1: Q10.1 R113.2
NetQ10_3: Q10.3 R108.2
NetR9_1: R9.1 U2.35
NetR22_1: R22.1 U2.6
NetR27_1: R27.1 U2.9
NetR36_1: R36.1 U2.10
NetR42_2: R42.2 R59.1 U7.4
NetR43_2: R43.2 R57.1 U7.2
NetR44_2: R44.2 R55.1 U7.5
NetR45_2: R45.2 R53.1 U7.1
NetR46_2: R46.2 R51.1 U7.12
NetR47_2: R47.2 R50.1 U7.15
NetR48_2: R48.2 R52.2 U7.14
NetR49_2: R49.2 R54.2 U7.13
NetR56_2: R56.2 R79.2 U8.4
NetR58_2: R58.2 R78.2 U8.2
NetR60_2: R60.2 R77.2 U8.5
NetR61_2: R61.2 R75.2 U8.1
NetR62_1: R62.1 R66.1 U8.13
NetR63_2: R63.2 R73.2 U8.12
NetR64_1: R64.1 R67.1 U8.14
NetR65_2: R65.2 R69.2 U8.15
NetR80_2: R80.2 R95.1 U14.4
NetR81_2: R81.2 R94.1 U14.2
NetR82_2: R82.2 R93.1 U14.5
NetR83_2: R83.2 R92.1 U14.1
NetR84_2: R84.2 R91.1 U14.12
NetR85_2: R85.2 R90.1 U14.15
NetR86_2: R86.2 R89.1 U14.14
NetR87_2: R87.2 R88.1 U14.13
NetR96_2: R96.2 R112.1 U15.4
NetR97_2: R97.2 R111.1 U15.2
NetR98_2: R98.2 R110.1 U15.5
NetR99_2: R99.2 R109.1 U15.1
NetR100_1: R100.1 R107.1 U15.12
NetR101_1: R101.1 R106.1 U15.15
NetR102_1: R102.1 R105.1 U15.14
NetR103_2: R103.2 R104.1 U15.13
NetR113_1: R113.1 U2.11
NetU2_14: U2.14 U6.1 U6.2
NetU2_16: U2.16 U6.6 U6.7
NetU2_36: U2.36 U7.11 U8.11 U14.11 U15.11
NetU2_37: U2.37 U7.10 U8.10 U14.10 U15.10
NetU2_38: U2.38 U7.9 U8.9 U14.9 U15.9
NetU13_1: U13.1 U13.2
NetU13_6: U13.6 U13.7
P6V-1: R52.1 U9.5
P6V-2: R50.2 U9.4
P6V-3: R51.2 U9.1
P12V-1: R53.2 U9.2 U10.5
P12V-2: R54.1 U10.4
R_G1: R62.2 R71.1 U11.2
R_G2: R64.2 R70.1 U12.5
R_G3: R60.1 R68.2 U12.4
R_G4: R61.1 R72.2 U12.1
R_G5: R63.1 R74.2 U12.2
R_G6: R65.1 R76.2 U5.2
R_nRst: R57.2 U11.4
R_S0: R58.1 U10.2
R_S1: R55.2 U10.1
R_S2: R56.1 U11.5
R_S7: R59.2 U11.1
RX7: D1.1 R1.2 U2.28
STATUS_Led_Green: DS3.2 U2.31
STATUS_Led_Oran: DS1.2 U2.33
STATUS_Led_Red: DS4.2 U2.30
STATUS_Led_Ylw: DS2.2 U2.32
TX7: U1.4 U2.29
Uart7Dir: U1.2 U1.3 U2.26
V5_1: R105.2 U18.5
V5_2: R106.2 U18.1
V5_3: R107.2 U18.2
V12_1: R88.2 U16.5
V12_2: R89.2 U16.4
V12_3: R104.2 U18.4
V33_1: R90.2 U16.2
V33_2: R91.2 U17.5
V33_3: R92.2 U17.4
V33_4: R93.2 U17.1
V33_5: R94.2 U17.2
V33_6: R95.2 U16.1
V33_7: R109.2 U19.5
V33_8: R110.2 U19.4
V33_9: DS11.2 DS12.1 J14.1 R111.2 U19.1
V33_10: DS11.1 DS12.2 J14.2 R112.2 U19.2
pads on no net: D1.2 D4.1 J1.4 J1.5 J1.6 J.1 J.2 J.3 J.4 J.5 J.6 J.7 J.8 J.9 J.10 J.11 J.12 J.13 J.14 J.15 J.16 J.17 J.18 J.19 J.20 J.21 J.22 J.23 J.24 J.25 J.26 J.27 J.28 J.29 J.30 J.31 J.32 J.33 J.34 J.35 J.36 J.37 J.38 J.39 J.40 R7.1 R43.1 R81.1 R97.1 U2.0 U2.1 U2.3.3V_1 U2.3.3V_2 U2.3.3V_3 U2.4 U2.5 U2.5V U2.7 U2.8 U2.12 U2.17 U2.20 U2.21 U2.22 U2.23 U2.24 U2.25 U2.27 U2.34 U2.39 U2.D+ U2.D- U2.GND2 U2.GND4 U2.GND5 U2.LED U2.ON/OFF U2.R+ U2.R- U2.T+ U2.T- U2.USB_GND1 U2.USB_GND2 U2.VBAT U2.VUSB U5.1 U5.7 U5.8 U9.7 U9.8 U10.7 U10.8 U11.7 U11.8 U12.7 U12.8 U16.7 U16.8 U17.7 U17.8 U18.7 U18.8 U19.7 U19.8

## Dimensions
0,132.207 to 139.7,136.525 on Top Layer

## Text inside footprints (layer, text, board x,y; h text height)
D7: Top Overlay "*" at 130.132,124.981 h1.27
F1: Top Assembly (Mech20) "String" at 72.918,124.224 h1.52
F2: Top Assembly (Mech20) "String" at 181.204,3.447 h1.52
J1: Top Overlay "6" at 214.581,37.593 h1.02 r90; Top Overlay "1" at 214.581,25.153 h1.02 r90
J5: Top Assembly (Mech20) "1" at 35.821,111.188 h1.52; Top Overlay "1" at 35.821,111.188 h1.52
J6: Top Assembly (Mech20) "1" at 22.232,111.188 h1.52; Top Overlay "1" at 22.232,111.188 h1.52
U1: Top Overlay "*" at 209.429,53.518 h1.27
U3: Top Assembly (Mech20) "*" at 140.63,53.016 h1.27 r90; Top Overlay "*" at 139.776,52.178 h0.64 r90
U5: Top Overlay "*" at 92.716,69.774 h1.27
U6: Top Assembly (Mech20) "*" at 88.321,91.072 h1.27; Top Overlay "*" at 86.955,92.253 h1.27
U7: Top Overlay "*" at 77.97,92.293 h1.27
U8: Top Overlay "*" at 156.583,104.993 h1.27
U9: Top Overlay "*" at 51.695,69.774 h1.27
U10: Top Overlay "*" at 60.458,69.774 h1.27
U11: Top Overlay "*" at 69.348,69.774 h1.27
U12: Top Overlay "*" at 83.399,69.901 h1.27
U13: Top Assembly (Mech20) "*" at 259.032,140.475 h1.27; Top Overlay "*" at 257.666,141.656 h1.27
U14: Top Overlay "*" at 217.543,7.33 h1.27
U15: Top Overlay "*" at 83.754,79.974 h1.27
U16: Top Overlay "*" at 165.106,10.084 h1.27
U17: Top Overlay "*" at 173.996,10.084 h1.27
U18: Top Overlay "*" at 182.886,10.084 h1.27
U19: Top Overlay "*" at 191.649,10.084 h1.27